# Altium PCB BMS_PCBPcbDoc.PcbDoc
Units mm, origin at the board's own origin, x right, y up, seen from the top; angles counter-clockwise.
Board outline 114.3 x 66.04 mm, 2 copper layers (Top Layer, Bottom Layer), stack 1.534 mm thick; 49 components, 39 nets, 154 pads, 0 vias.
Unrouted connection lines stored in the file: 101.
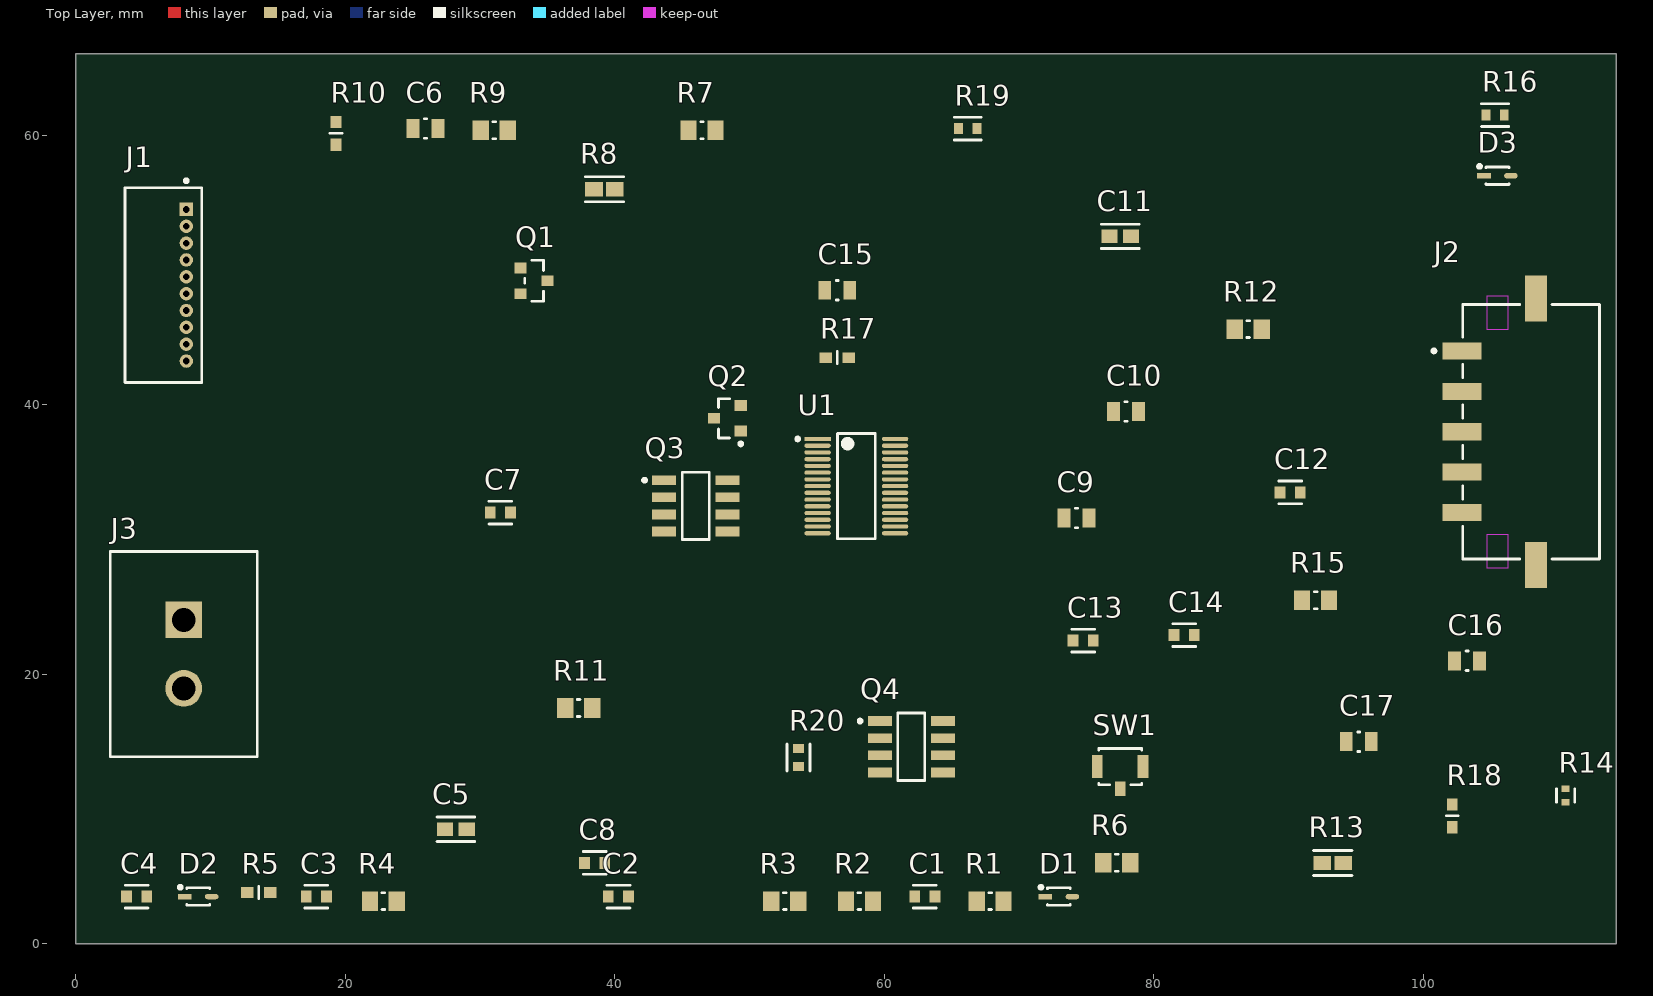
[diagram p0: Top Layer view]
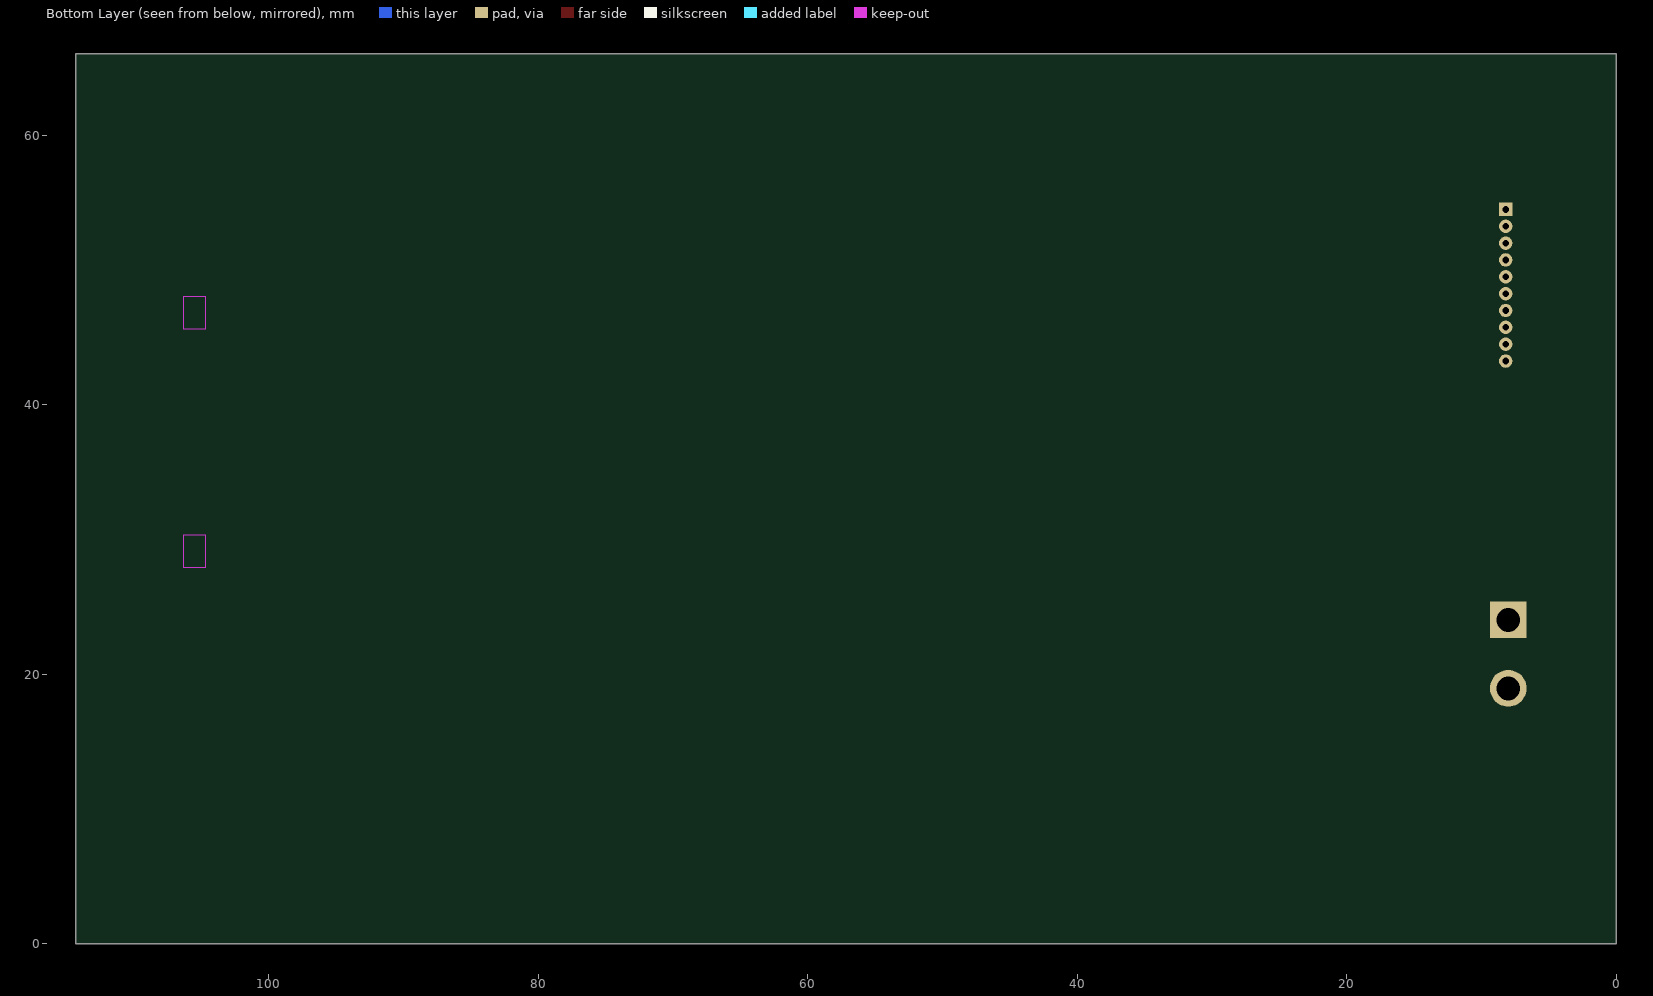
[diagram p1: Bottom Layer view, seen from below]

## Layer stack, top to bottom
Top Solder: solder mask 0.0127, Solder Resist, Dk 3.3
Top Layer: signal copper 0.0178
Dielectric1: core 1.4986, FR-4, Dk 4.3
Bottom Layer: signal copper 0.0178
Bottom Solder: solder mask 0.0127, Solder Resist, Dk 3.3

## Board outline
0,0 114.3,0 114.3,66.04 0,66.04

## Design rules (kind name [scope] priority, off if disabled: settings)
Clearance [All] p1: gap=0.254 ignorepadtopadclearanceinfootprint=FALSE
DiffPairsRouting [All] p1: maxlimit=0.254 minlimit=0.254 mostfreqgap=0.254 toplayer_minwidth=0.254 toplayer_maxwidth=0.254 toplayer_prefwidth=0.254 bottomlayer_minwidth=0.254 bottomlayer_maxwidth=0.254 bottomlayer_prefwidth=0.254 maxuncoupledlength=12.7
HoleSize [All] p1: absolutevalues=TRUE maxlimit=7.62 minlimit=0.254 maxpercent=80.000 minpercent=20.000
MinimumAnnularRing [All] p1: minimumring=0.254
PasteMaskExpansion [All] p1: expansion=0.254
PlaneClearance [All] p1: clearance=0.381
PlaneConnect [All] p1: pad.planeconnectstyle=Relief pad.reliefexpansion=0.508 pad.reliefentries=4 pad.reliefconductorwidth=0.254 pad.reliefairgap=0.254 via.planeconnectstyle=Direct via.reliefexpansion=0.508 via.reliefentries=4 via.reliefconductorwidth=0.254 via.reliefairgap=0.254
PolygonConnect [All] p1: thpad.connectstyle=Relief thpad.reliefconductorwidth=0.254 thpad.reliefentries=4 thpad.polygonreliefangle="90 Angle" thpad.airgapwidth=0.254 smdpad.connectstyle=Relief smdpad.reliefconductorwidth=0.254 smdpad.reliefentries=4 smdpad.polygonreliefangle="90 Angle" smdpad.airgapwidth=0.254 via.connectstyle=Direct via.reliefconductorwidth=0.254 via.reliefentries=4 via.polygonreliefangle="90 Angle" via.airgapwidth=0.254
RoutingVias [All] p1: holewidth=0.254 width=0.508 viastyle="Through Hole" minholewidth=0.254 minwidth=0.508 maxholewidth=0.254 maxwidth=0.508
SMDNeckDown [All] p1: percent=100.000
SilkToSolderMaskClearance SilkscreenOverComponentPads [IsPad] p1: minsilkscreentomaskgap=0.254 clearancetoexposedcopper=TRUE
SolderMaskExpansion [All] p1: expansion=0.254 istentingtop=FALSE
SupplyNets "Schematic Supply Nets_1" [InNet('GND')] p1: voltage=0.000
SupplyNets "Schematic Supply Nets" [InNet(' GND')] p2: voltage=0.000
Width [All] p1: maxlimit=0.254 minlimit=0.254 preferedwidth=0.254
24 further rules are at their usual default settings.

## Components (designator, comment, footprint, x,y, rotation, side; value= is the part's Value field where it differs from the comment)
C1 "CC0603KRX7R7BB105" FP-CC0603-DA-MFG 62.996,3.5 r0 top value="1 uF"
C2 "CC0603KRX7R7BB105" FP-CC0603-DA-MFG 40.263,3.5 r0 top value="1 uF"
C3 "CC0603KRX7R7BB105" FP-CC0603-DA-MFG 17.835,3.5 r0 top value="1 uF"
C4 "CC0603KRX7R7BB105" FP-CC0603-DA-MFG 4.5,3.5 r0 top value="1 uF"
C5 "GRM188R60J106ME47D" FP-GRM188-0_1-e0_2_0_55-IPC_A 28.198,8.5 r0 top
C6 "CC0805KKX7R7BB105" FP-CC0805-0_85-MFG 25.939,60.503 r0 top value="1 uF"
C7 "CC0603KRX7R7BB105" FP-CC0603-DA-MFG 31.5,32 r0 top value="1 uF"
C8 "CC0603KRX7R7BB105" FP-CC0603-DA-MFG 38.5,6 r0 top value="1 uF"
C9 "CC0805KKX7R7BB105" FP-CC0805-0_85-MFG 74.25,31.6 r0 top value="1 uF"
C10 "CC0805KKX7R7BB105" FP-CC0805-0_85-MFG 77.925,39.5 r0 top value="1 uF"
C11 "GRM188R60J106ME47D" FP-GRM188-0_1-e0_2_0_55-IPC_A 77.5,52.5 r0 top
C12 "CC0603KRX5R6BB475" FP-CC0603-DA-MFG 90.119,33.5 r0 top value="4.7 uF"
C13 "CC0603KRX7R7BB105" FP-CC0603-DA-MFG 74.75,22.5 r0 top value="1 uF"
C14 "CC0603KRX7R7BB105" FP-CC0603-DA-MFG 82.25,22.911 r0 top value="1 uF"
C15 "CC0805KRX7R9BB104" FP-CC0805-0_85-MFG 56.5,48.5 r180 top value="100 nF"
C16 "CC0805KRX7R9BB104" FP-CC0805-0_85-MFG 103.245,21 r0 top value="100 nF"
C17 "CC0805KRX7R9BB104" FP-CC0805-0_85-MFG 95.205,15 r0 top value="100 nF"
D1 "1N4148WS" FP-477AB-IPC_C 72.953,3.5 r0 top
D2 "1N4148WS" FP-477AB-IPC_C 9.072,3.5 r0 top
D3 "1N4148WS" FP-477AB-IPC_C 105.5,57 r0 top
J1 "53048-1010" FP-530481010-MFG 6.488,48.875 r90 top
J2 "43650-0514" FP-43650-0514-MFG 108,38 r90 top
J3 "350539-1" FP-350539-1-MFG 8,21.5 r90 top
Q1 "NVTR4503NT1G" On_Semiconductor_318-08_MFG 34,49.2 r0 top
Q2 "NTR1P02LT3G" ONSC-SOT-23-3-318-08_V 48.34,39 r180 top
Q3 "IRF7470TRPBF" FP-PG-DSO-8-MFG 46,32.5 r0 top
Q4 "IRF7470TRPBF" FP-PG-DSO-8-MFG 62,14.623 r0 top
R1 "RC0805FR-071KL" RESC2013X60X35ML10T20 67.848,3.17 r0 top
R2 "RC0805FR-071KL" RESC2013X60X35ML10T20 58.145,3.17 r0 top
R3 "RC0805FR-071KL" RESC2013X60X35ML10T20 52.608,3.17 r0 top
R4 "RC0805FR-071KL" RESC2013X60X35ML10T20 22.813,3.17 r0 top
R5 "RC0603FR-07100RL" FP-RC0603-0_55-MFG 13.568,3.805 r0 top
R6 "RC0805FR-071KL" RESC2013X60X35ML10T20 77.241,6.011 r0 top
R7 "RC0805FR-071KL" RESC2013X60X35ML10T20 46.462,60.376 r0 top
R8 "NCP18XH103F03RB" FP-NCP18-0_15-IPC_A 39.224,56 r0 top
R9 "RC0805FR-071KL" RESC2013X60X35ML10T20 31.044,60.376 r0 top
R10 "RC0603FR-07100RL" FP-RC0603-0_55-MFG 19.309,60.147 r90 top
R11 "RC0805FR-071KL" RESC2013X60X35ML10T20 37.313,17.5 r0 top
R12 "RC0805FR-071KL" RESC2013X60X35ML10T20 87,45.625 r0 top
R13 "NCP18XH103F03RB" FP-NCP18-0_15-IPC_A 93.276,6 r0 top
R14 "AC0402FR-0710KL" FP-AC0402-MFG 110.56,11 r90 top
R15 "RC0805FR-071KL" RESC2013X60X35ML10T20 92,25.5 r0 top
R16 "AC0603FR-071ML" FP-AC0603-IPC_C 105.327,61.5 r180 top
R17 "RC0603FR-07100RL" FP-RC0603-0_55-MFG 56.5,43.5 r0 top
R18 "RC0603FR-07100RL" FP-RC0603-0_55-MFG 102.145,9.5 r90 top
R19 "AC0603FR-071ML" FP-AC0603-IPC_C 66.188,60.5 r0 top
R20 "AC0603FR-071ML" FP-AC0603-IPC_C 53.625,13.823 r90 top
SW1 "B3U-1100P" FP-B3U-1100P-MFG 77.5,13.15 r0 top
U1 "BQ7693000DBT" FP-DBT0030A-IPC_A 57.917,33.968 r0 top

## Footprints (in the part's own frame and the unit in brackets; to place one, negate y for a bottom-side part, rotate by r counter-clockwise, add the part's x,y. Pads: shape width x height; smd on the part's side, far side on the other; paste and mask are expansions set on the pad)
FP-477AB-IPC_C [mm]
  rect 1.006x0.392 smd paste+0 mask+0: 1(-1,0)
  rrect100% 1.006x0.392 smd paste+0 mask+0: 2(1,0)
  silkscreen extent -1.46,-0.65 0.85,0.82, body extent -1.6,-0.72 1.6,0.72, height 0.25
FP-43650-0514-MFG [mm]
  rect 1.27x2.92 smd paste+0 mask+0: 1(6,5.13) 2(3,5.13) 3(0,5.13) 4(-3,5.13) 5(-6,5.13)
  rect 3.43x1.65 smd paste+0 mask+0: 6(-9.885,-0.35) 7(9.885,-0.35)
  Keep-Out Layer region: 7.625,1.7 10.075,1.7 10.075,3.3 7.625,3.3
  Keep-Out Layer region: -10.075,1.7 -7.625,1.7 -7.625,3.3 -10.075,3.3
  silkscreen extent -9.45,-5.07 9.45,7.34, body extent -11.7,-5.18 11.7,6.69, height 0.25
FP-350539-1-MFG [mil]
  rect 107.4x107.4 hole 70 paste-99999 mask+0: 1(100,0)
  round 107.4 hole 70 paste-99999 mask+0: 2(-100,0)
  silkscreen extent -300,-215 300,215, body extent -304,-219 304,219, height 10
FP-530481010-MFG [mm]
  rect 1x1 hole 0.5 paste-2539.97 mask+0: 1(5.625,-1.7)
  round 1 hole 0.5 paste-2539.97 mask+0: 2(4.375,-1.7) 3(3.125,-1.7) 4(1.875,-1.7) 5(0.625,-1.7) 6(-0.625,-1.7) 7(-1.875,-1.7) 8(-3.125,-1.7) 9(-4.375,-1.7) 10(-5.625,-1.7)
  silkscreen extent -7.22,-2.85 7.87,2.85, body extent -7.32,-2.95 7.32,2.95, height 0.25
FP-AC0402-MFG [mm]
  rect 0.5x0.6 smd paste+0 mask+0: 1(-0.5,0) 2(0.5,0)
  silkscreen extent -0.5,-0.67 0.5,0.67, body extent -0.85,-0.4 0.85,0.4, height 0.25
FP-AC0603-IPC_C [mm]
  rect 0.659x0.812 smd paste+0 mask+0: 1(-0.677,0) 2(0.677,0)
  silkscreen extent -1.01,-0.85 1.01,0.85, body extent -1.11,-0.55 1.11,0.55, height 0.25
FP-B3U-1100P-MFG [mm]
  rect 0.8x1.7 smd paste+0 mask+0: 1(1.7,0) 2(-1.7,0)
  rect 0.8x1.1 smd paste+0 mask+0: 3(0,-1.65)
  silkscreen extent -1.6,-1.35 1.6,1.35, body extent -2.2,-2.3 2.2,1.45, height 0.25
FP-CC0603-DA-MFG [mm]
  rect 0.8x0.9 smd paste+0 mask+0: 1(-0.75,0) 2(0.75,0)
  silkscreen extent -0.85,-0.85 0.85,0.85, body extent -1.35,-0.75 1.35,0.75, height 0.25
FP-CC0805-0_85-MFG [mm]
  rect 0.95x1.4 smd paste+0 mask+0: 1(-0.925,0) 2(0.925,0)
  silkscreen extent -0.08,-0.72 0.08,0.72, body extent -1.6,-1.05 1.6,1.05, height 0.25
FP-DBT0030A-IPC_A [mm]
  rect 1.955x0.312 smd paste+0 mask+0: 1(-2.875,3.5)
  rrect100% 1.955x0.312 smd paste+0 mask+0: 2(-2.875,3) 3(-2.875,2.5) 4(-2.875,2) 5(-2.875,1.5) 6(-2.875,1) 7(-2.875,0.5) 8(-2.875,0) 9(-2.875,-0.5) 10(-2.875,-1) 11(-2.875,-1.5) 12(-2.875,-2) 13(-2.875,-2.5) 14(-2.875,-3) 15(-2.875,-3.5) 16(2.875,-3.5) 17(2.875,-3) 18(2.875,-2.5) 19(2.875,-2) 20(2.875,-1.5) 21(2.875,-1) 22(2.875,-0.5) 23(2.875,0) 24(2.875,0.5) 25(2.875,1) 26(2.875,1.5) 27(2.875,2) 28(2.875,2.5) 29(2.875,3) 30(2.875,3.5)
  silkscreen extent -4.48,-3.9 1.4,3.9, body extent -4.35,-4.4 4.35,4.4, height 0.25
FP-GRM188-0_1-e0_2_0_55-IPC_A [mm]
  rect 1.208x1.012 smd paste+0 mask+0: 1(-0.802,0) 2(0.802,0)
  silkscreen extent -1.41,-0.91 1.41,0.91, body extent -1.91,-1.01 1.91,1.01, height 0.25
FP-NCP18-0_15-IPC_A [mm]
  rect 1.306x1.058 smd paste+0 mask+0: 1(-0.776,0) 2(0.776,0)
  silkscreen extent -1.43,-0.93 1.43,0.93, body extent -1.93,-1.03 1.93,1.03, height 0.25
FP-PG-DSO-8-MFG [mm]
  rect 1.78x0.72 smd paste+0 mask+0: 1(-2.34,1.905) 2(-2.34,0.635) 3(-2.34,-0.635) 4(-2.34,-1.905) 5(2.34,-1.905) 6(2.34,-0.635) 7(2.34,0.635) 8(2.34,1.905)
  silkscreen extent -3.92,-2.5 1,2.5, body extent -3.33,-2.68 3.33,2.68, height 0.25
FP-RC0603-0_55-MFG [mm]
  rect 0.9x0.8 smd paste+0 mask+0: 1(-0.85,0) 2(0.85,0)
  silkscreen extent 0,-0.45 0,0.45, body extent -1.4,-0.55 1.4,0.55, height 0.25
On_Semiconductor_318-08_MFG [mm]
  rect 0.9x0.8 smd paste+0 mask+0: 1(-1,0.95) 2(-1,-0.95) 3(1,0)
  silkscreen extent -0.7,-1.52 0.7,1.52, body extent -1.55,-1.62 1.55,1.62, height 0.25
ONSC-SOT-23-3-318-08_V [mm] "SOT23, 3-Leads, Body 2.92x1.3mm, Pitch 0.95mm"
  rect 0.9x0.8 smd: 1(-1,0.95) 2(-1,-0.95) 3(1,0)
  silkscreen extent -1.13,-1.46 0.65,2.02, body extent -0.65,-1.46 0.65,1.46, height 1.11
RESC2013X60X35ML10T20 [mm] "Chip Resistor, 2-Leads, Body 2.1x1.35mm, IPC Low Density"
  rect 1.2x1.45 smd: 1(-1,0) 2(1,0)
  silkscreen extent -0.1,-0.63 0.1,0.63, body extent -1.05,-0.68 1.05,0.67, height 0.6

## Part data
C1 C2 C3 C4 C7 C8 C13 C14: library part CMP-03422-000924-1, "CAP CER 1UF 16V X7R 0603", Capacitance="1 uF", Manufacturer=YAGEO, Package=CC0603-DA, Temperature="-55°C to +125°C", Temperature Characteristic=X7R, Temperature Coefficient=15%, Temperature Range High=+125°C, Temperature Range Low=-55°C, Tolerance=0.1, Voltage="16 V", Automotive=No, Category=Cap, ComponentLink2Description=Datasheet, ComponentLink2URL=http://www.yageo.com/documents/recent/UPY-GPHC_X7R_6.3V-to-50V_18.pdf, Device Class L1="Passive Components", Device Class L2=Capacitors, Device Class L3="Ceramic Capacitors", Digikey Description="CAP CER 1UF 16V X7R 0603", Footprint Url=http://www.yageo.com/exep/pages/download/literatures/UPY-C_GEN_24.pdf, Height=0.9mm, Lead Free=Yes, Manufacturer Part Number=CC0603KRX7R7BB105, Material=Ceramic, Mouser Description="Multilayer Ceramic Capacitor, CC Series, 1 - F, - 10%, X7R, 16 V, 0603 [1608 Metric]", Octopart=https://octopart.com/cc0603krx7r7bb105-yageo-42271928, RoHS=TRUE, Voltage Rating="16 V"
C5 C11: library part CMP-2006-02792-2, "Chip Multilayer Ceramic Capacitors for General Purpose, 0603, 10uF, X5R, 15%, 20%, 6.3V", Capacitance=10uF, Case Code (Imperial)=0603, Case Code (Metric)=1608, Dielectric=X5R, Max Operating Temperature=85°C, Min Operating Temperature=-55°C, Package Quantity=4000, Tolerance=20%, Voltage=6.3V, Case/Package=0603, Depth=0.8mm, Height=0.8mm, Lead Free="Lead Free", Length=1.6mm, Material=Ceramic, Mount="Surface Mount", Packaging="Tape and Reel", Radiation Hardening=No, REACH SVHC="No SVHC", Termination=SMD/SMT, Thickness=0.035inch, Voltage Rating=6.3V, Voltage Rating (DC)=6.3V, Width=0.031inch
C6 C9 C10: library part CMP-03422-000001-1, "CAP CER 1UF 16V X7R 0805", Capacitance="1 uF", Manufacturer=Yageo, Package=CC0805-0.85, Temperature="-30°C to +85°C", Temperature Characteristic=X7R, Temperature Range High=+85°C, Temperature Range Low=-30°C, Tolerance=0.1, Voltage Rating="16 V", Automotive=No, Category=Cap, ComponentLink2Description=Datasheet, ComponentLink2URL=http://www.yageo.com/documents/recent/UPY-GPHC_Y5V_6.3V-to-50V_8.pdf, Device Class L1="Passive Components", Device Class L2=Capacitors, Device Class L3="Ceramic Capacitors", Digikey Description="CAP CER 1UF 16V X7R 0805", Footprint Url=http://www.yageo.com/exep/pages/download/literatures/UPY-C_GEN_24.pdf, Height=0.95mm, Ipc Land Pattern Name=CAPC200125X85, Lead Free=Yes, Manufacturer Part Number=CC0805KKX7R7BB105, Material=Ceramic, Mouser Description="Multilayer Ceramic Capacitors MLCC - SMD/SMT 1.0uF 16V X7R 10%", Octopart=https://octopart.com/cc0805kkx7r7bb105-yageo-8376555, RoHS=TRUE
C12: library part CMP-2000-06074-2, "CAP CER 4.7UF 10V X5R 0603", Capacitance="4.7 uF", Manufacturer=YAGEO, Package=CC0603-DA, Temperature="-55°C to +125°C", Temperature Characteristic=X5R, Temperature Coefficient=15%, Temperature Range High=+125°C, Temperature Range Low=-55°C, Tolerance=0.1, Voltage="10 V", Automotive=No, Category=Cap, ComponentLink2Description=Datasheet, ComponentLink2URL=http://www.yageo.com/documents/recent/UPY-GPHC_X7R_6.3V-to-50V_18.pdf, Device Class L1="Passive Components", Device Class L2=Capacitors, Device Class L3="Ceramic Capacitors", Digikey Description="CAP CER 4.7UF 10V X5R 0603", Footprint Url=http://www.yageo.com/exep/pages/download/literatures/UPY-C_GEN_24.pdf, Height=0.9mm, Lead Free=Yes, Manufacturer Part Number=CC0603KRX5R6BB475, Material=Ceramic, Mouser Description="4.7µF Surface Mount, MLCC 0603 (1608 Metric) Package Ceramic Capacitors", Octopart=https://octopart.com/cc0603krx5r6bb475-yageo-9292507, RoHS=TRUE, Voltage Rating="10 V"
C15 C16 C17: library part CMP-2100-03606-3, "CAP CER 0.1UF 50V X7R 0805", Capacitance="100 nF", Manufacturer=Yageo, Package=CC0805-0.85, Temperature="-30°C to +85°C", Temperature Characteristic=X7R, Temperature Range High=+85°C, Temperature Range Low=-30°C, Tolerance=0.1, Voltage Rating="50 V", Automotive=No, Category=Cap, ComponentLink2Description=Datasheet, ComponentLink2URL=http://www.yageo.com/documents/recent/UPY-GPHC_Y5V_6.3V-to-50V_8.pdf, Device Class L1="Passive Components", Device Class L2=Capacitors, Device Class L3="Ceramic Capacitors", Digikey Description="CAP CER 0.1UF 50V X7R 0805", Footprint Url=http://www.yageo.com/exep/pages/download/literatures/UPY-C_GEN_24.pdf, Height=0.95mm, Ipc Land Pattern Name=CAPC200125X85, Lead Free=Yes, Manufacturer Part Number=CC0805KRX7R9BB104, Material=Ceramic, Mouser Description="Multilayer Ceramic Capacitors MLCC - SMD/SMT 100nF 50V X7R 10%", Octopart=https://octopart.com/cc0805krx7r9bb104-yageo-192993, RoHS=TRUE
D1 D2 D3: library part CMP-07163-000040-1, "DIODE GEN PURP 75V 150MA SOD323F", Average Rectified Current=150mA, Forward Voltage=1V, Max Forward Surge Current (Ifsm)=2A, Max Operating Temperature=150°C, Max Repetitive Reverse Voltage (Vrrm)=75V, Min Operating Temperature=-55°C, Package Quantity=1, Peak Reverse Current=5uA, Power Dissipation=200mW, Contact Plating=Tin, Element Configuration=Single, Forward Current=150mA, Height=1mm, Lead Free="Lead Free", Length=1.8mm, Max Reverse Voltage (DC)=75V, Mount="Surface Mount", Number of Pins=2, Packaging="Tape and Reel", Radiation Hardening=No, REACH SVHC="No SVHC", Recovery Time=4ns, Reverse Recovery Time=4ns, Reverse Voltage=75V, Weight=0.0276g, Width=1.35mm
J1: library part CMP-04776-000812-2, "CONN HEADER R/A 10POS 1.25MM", Color=Natural, Contact Resistance=20mΩ, Current Rating=1A, Flammability Rating="UL94 V-0", Insulation Resistance=100MΩ, Manufacturer Lifecycle Status=ACTIVE, Max Operating Temperature=85°C, Max Voltage Rating (AC)=125V, Min Operating Temperature=-40°C, Body Plating=Tin, Contact Material=Tin, Contact Plating=Tin, Country of Origin=US, Depth=5.5mm, Gender=Male, Glow Wire Compliant=Non-compliant, Height=3.7mm, Housing Color=Natural, Housing Material=Nylon, Lead Free="Lead Free", Lead Pitch=1.25mm, Length=14.25mm, Lifecycle Status=Production, Max Current Rating=1A, Mount="Through Hole", NexarPartId=276823, Number of Circuits=10, Number of Contacts=10, Number of Pins=10, Number of Poles=10, Number of Positions=10, Number of Rows=1, Orientation="Right Angle", Pitch=1.25mm, Plating=Tin, Radiation Hardening=No, REACH SVHC=Unknown, RoHS=Compliant, Schedule B="8536694040, 8536694040", Termination=Solder, Voltage Rating=125V, Voltage Rating (AC)=125V, Voltage Rating (DC)=125V, Working Voltage=125V
J2: library part CMP-00257-07658320-1, "43650-0514 Conn Power HDR 5 POS 3mm Solder RA SMD 5 Terminal 1 Port Micro-Fit 3.0™ Embossed T/R", Current Rating=5A, Manufacturer Lifecycle Status=ACTIVE, Voltage Rating=600V, Contact Material=Brass, Contact Plating=Gold, Country of Origin=US, Gender=Male, Glow Wire Compliant=Compliant, Halogen Free="Low Halogen", Housing Material=Thermoplastic, Lifecycle Status=Production, NexarPartId=7658320, Number of Circuits=5, Number of Contacts=5, Number of Positions=5, Number of Rows=1, Orientation="Right Angle", Pitch=3mm, Plating=Tin, RoHS=Compliant, Termination=Solder
J3: library part CMP-03369-000078-1, "CONN HEADER VERT 2POS 5.08MM", Current Rating=12A, Manufacturer="TE Connectivity", Temperature="-55°C to +105°C", Temperature Range High=+105°C, Temperature Range Low=-55°C, Voltage Rating=250V, Automotive=No, Category=Conn, ComponentLink2Description=Datasheet, ComponentLink2URL=https://www.te.com/usa-en/product-350539-1.html?te_bu=Cor&te_type=other&te_campaign=oct_glo_cor-oct-global-oth-prtnr-fy19-oct-octo-buy-bom_sma-298_2&elqCampaignId=35216, Conn Gender=Male, Conn Orientation=Vertical, Contact Material=Gold,Nickel, Device Class L1=Connectors, Device Class L2="Headers and Wire Housings", Device Class L3=unset, Digikey Description="CONN HEADER VERT 2POS 5.08MM", Height=0.41inch, Lead Free=Yes, Manufacturer Part Number=350539-1, Mouser Description="Pin & Socket Connectors CONN PCM 2 POS TIN", Number of Contacts=2, Number of Rows=1, Octopart=https://octopart.com/350539-1-te+connectivity-46510628, Package=350539-1, Pitch=5.08mm, RoHS=TRUE, Standoff Height=0.025inch
Q1: library part CMP-1058-00743-2, Case/Package=SOT-23, Continuous Drain Current (ID)=1.5A, Drain to Source Breakdown Voltage=36V, Drain to Source Resistance=85mΩ, Drain to Source Voltage (Vdss)=30V, Gate to Source Voltage (Vgs)=20V, Input Capacitance=135pF, Manufacturer Lifecycle Status=ACTIVE, Max Junction Temperature (Tj)=150°C, Max Power Dissipation=420mW, Min Operating Temperature=-55°C, Element Configuration=Single, Height=1.01mm, Lead Free="Lead Free", Length=3.04mm, Lifecycle Status=Production, Max Operating Temperature=150°C, NexarPartId=18688338, Number of Channels=1, Number of Elements=1, Number of Pins=3, Packaging=Digi-Reel®, Power Dissipation=420mW, Radiation Hardening=No, Rds On Max=110mΩ, RoHS=Compliant, Schedule B="8541210080, 8541210080", Turn-Off Delay Time=14ns, Turn-On Delay Time=5.8ns, Width=1.4mm
Q2: library part CMP-1058-00747-1, "Power MOSFET, -20 V, -1.3 A, P-Channel, 3-Pin SOT-23, Pb-Free, Tape and Reel", Manufacturer="On Semiconductor", Package Type=SOT-23-3, Channel Polarity="P Channel", Ciss Typ (pF)=225, ComponentLink1Description="Manufacturer URL", ComponentLink1URL=http://www.onsemi.com/, ComponentLink2Description=Datasheet, ComponentLink2URL=http://www.onsemi.cn/pub_link/Collateral/NTR1P02LT1-D.PDF, ComponentLink3Description="Package Specification", ComponentLink3URL=http://www.onsemi.cn/pub_link/Collateral/318-08.PDF, Configuration=Single, Coss Typ (pF)=130, Crss Typ (pF)=55, DatasheetVersion="Rev. 13", ID Max (A)=1.3, Mounting Technology="Surface Mount", PackageDescription="3-Pin Small Outline Transistor, Body 2.92 x 1.3 mm, Pitch 0.95 mm", PackageReference=SOT-23-3-318-08, PackageVersion="Rev. AP, 11/2009", Packing="Tape and Reel", PartNumber=NTR1P02LT3G, PD Max (W)=0.4, Qrr Typ (nC)=8.5, RoHS=Pb-Free, V(BR)DSS Min (V)=20, VGS Max (V)=12, VGS(th) Max (V)=1.25
Q3 Q4: library part CMP-32901-000117-1, "MOSFET N-CH 40V 10A 8-SOIC", Continuous Drain Current=10A, Drain to Source Breakdown Voltage=40V, Drain to Source Resistance=10mΩ, Gate To Source Voltage=12V, Input Capacitace At Vds="3430pF @ 20V", Manufacturer=Infineon, Max Forward Diode Voltage=1.3V, Max Junction Temp=+150°C, Package=PG-DSO-8, Power Dissipation=2.5W, Pulse Drain Current=85A, Temperature="-55°C to +150°C", Temperature Range Low=-55°C, Typ Forward Diode Voltage=0.8V, Automotive=No, Category=Trans, ComponentLink2Description=Datasheet, ComponentLink2URL=https://www.infineon.com/dgdl/irf7470pbf.pdf?fileId=5546d462533600a4015355ff2fe11c18, Depletion Mode=False, Device Class L1="Discrete Semiconductors", Device Class L2=Transistors, Device Class L3=MOSFETs, Digikey Description="MOSFET N-CH 40V 10A 8-SOIC", Drain To Source Voltage=40V, Footprint Url=https://www.infineon.com/dgdl/po-so8.pdf?fileId=5546d462580663ef0158068a1275014d, Gate Charge At Vgs="29nC @ 4.5V", Height=1.75mm, Lead Free=Yes, Manufacturer Part Number=IRF7470TRPBF, Number of Channels=1, Number Of N Channels=1, Octopart=https://octopart.com/irf7470trpbf-infineon-65873616, Reverse Recovery Charge=130nC, Reverse Recovery Time=72ns, RoHS=TRUE, Rthja Max=50°C/W, Standoff Height=0.1mm, Temperature Range High=+150°C, Threshold Vgs Max=2V, Threshold Vgs Min=0.8V, Turn Off Delay Time=21ns, Turn On Delay Time=10ns
R1 R2 R3 R4 R6 R7 R9 R11 R12 R15: library part CMP-2100-03671-1, "Chip Resistor, 1 KOhm, +/- 1%, 125 mW, -55 to 155 degC, 0805 (2012 Metric), RoHS, Tape and Reel", Case Code (Imperial)=0805, Case Code (Metric)=2012, Manufacturer=Yageo, Max Operating Temperature=155degC, Max Power Dissipation=125mW, Min Operating Temperature=-55degC, Package Description="2-Pin Surface Mounted Device, Body 2 x 1.25 mm", Package Quantity=1, Resistance=1KOhm, Temperature Coefficient=100ppm/degreesC, Tolerance=1%, Voltage Rating=150V, Case/Package=0805, Composition=ThickFilm, Datasheet URL=http://www.yageo.com/NewPortal/yageodocoutput?fileName=/pdf/R-Chip/PYu-RC_Group_51_RoHS_L_5.pdf, Datasheet Version="Rev. 5, 10/2016", Depth=1.25mm, Height=0.024inch, Lead Free=LeadFree, Length=0.079inch, Manufacturer URL=http://www.yageo.com/, Military Standard=Not, Number of Pins=2, Number of Terminations=2, Package Reference=0805, Packaging=TapeandReel, Power Rating=125mW, REACH SVHC=Unknown, RoHSCompliant=true, Termination=SMD/SMT, Voltage Rating (DC)=150V, Width=0.049inch
R5 R10 R17 R18: library part CMP-2100-03663-2, Case Code (Imperial)=0603, Max Operating Temperature=155°C, Min Operating Temperature=-55°C, Power Rating=100mW, Resistance=100Ω, Temperature Coefficient=100ppm/°C, Tolerance=1%, Voltage Rating=50V, Case Code (Metric)=0603, Case/Package=0603, Composition="Thick Film", Depth=800µm, Height=450µm, Lead Free="Lead Free", Length=1.6mm, Military Standard=Not, NexarPartId=55402879, Number of Pins=2, Packaging="Tape & Reel", REACH SVHC=Unknown, RoHS=Compliant, Schedule B="8533210045, 8533210045", Termination=SMD/SMT, Voltage Rating (DC)=50V, Width=800µm
R8 R13: library part CMP-2000-05271-3, "NTC Thermistor for Temperature Sensor, 0603, 10kΩ, 1%, 0.1mA, 5V", Case Code (Imperial)=0603, Case Code (Metric)=1608, Current Rating=310uA, Manufacturer Series=NCP18, Max Operating Temperature=125°C, Max Power Dissipation=100mW, Min Operating Temperature=-40°C, Package Quantity=1, Package Shape=Rectangular, Resistance=10kR, Resistance Tolerance=1%, Accuracy=0.7%, Case/Package=0603, Depth=0.8mm, Height=0.8mm, Lead Free="Lead Free", Length=1.6mm, Mount="Surface Mount", Number of Pins=2, Number of Terminals/Pins=2, Packaging="Tape and Reel", Power Rating=100mW, Radiation Hardening=No, REACH SVHC="No SVHC", RoHS Compliant=Yes, Series=NCP, Terminal Finish=Tin, Terminal Placement=Dual, Termination=SMD/SMT, Thermistor Application="TEMPERATURE COMPENSATION", Tolerance=1%
R14: library part CMP-2002-01790-3, "RES 10kΩ ±1% 0.063W 0402", Case Code (Imperial)=0402, Case Code (Metric)=1005, Max Operating Temperature=155°C, Max Power Dissipation=63mW, Min Operating Temperature=-55°C, Power Rating=62.5mW, Resistance=10kR, Resistor Type="Thick Film", Temperature Coefficient=100ppm/°C, Tolerance=1%, Voltage Rating=50V, Case/Package=0402, Construction=Rectangular, Depth=0.5mm, Features="Moisture Resistant", Height=0.015inch, Lead Free="Lead Free", Length=0.039inch, Military Standard=Not, Number of Terminations=2, Packaging="Tape and Reel", RoHS Compliant=Yes, Series=AC, Size Code=0402, Termination=SMD/SMT, Width=0.02inch
R16 R19 R20: library part CMP-2000-04829-2, "RES 1MΩ 1.00% 0.1W 0603", Case Code (Imperial)=0603, Case Code (Metric)=1608, Max Operating Temperature=155°C, Max Power Dissipation=100mW, Min Operating Temperature=-55°C, Package Quantity=1, Ratings=AEC-Q200, Resistance=1MR, Resistor Type="Thick Film", Temperature Coefficient=100ppm/°C, Tolerance=1%, Voltage Rating=50V, Case/Package=0603, Features="Moisture Resistant", Height=0.022inch, Lead Free="Lead Free", Length=0.063inch, Number of Terminations=2, Packaging="Tape and Reel", Power Rating=100mW, RoHS Compliant=Yes, Series=AC, Termination=SMD/SMT, Width=0.031inch
SW1: library part CMP-2000-05903-2, "SWITCH TACTILE SPST-NO 0.05A 12V", Contact Current Rating=50mA, Contact Resistance=100mR, Max Operating Temperature=70°C, Max Voltage Rating (DC)=12V, Min Operating Temperature=-25°C, Operating Force=1.5N, Package Quantity=1, Ratings="Dust Proof", Actuator Length=0.4mm, Actuator Type=Standard, Contact Plating=Silver, Current Rating=50mA, Depth=4mm, Electrical Life=200000Cycles, Illumination Type=Non-Illuminated, Lead Free="Lead Free", Length=3.15mm, Max Current Rating=50mA, Mechanical Life=200000Cycles, Mount="Surface Mount", Orientation=Straight, Packaging="Tape and Reel", Switch Function=Off-Mom, Switch Travel=0.15mm, Termination=SMD/SMT, Throw Configuration=SPST, Voltage Rating (DC)=12V, Weight=0.022g
U1: library part CMP-04911-000035-1, "IC BATT MGMT LI-ION AFE 30TSSOP", Case/Package=TSSOP, Max Operating Temperature=85°C, Min Operating Temperature=-40°C, Operating Supply Voltage=25V, Output Voltage=3.6V, Package Quantity=60, Contact Plating=Gold, Fault Protection="Over Current", Interface=I2C, Lead Free="Lead Free", Mount="Surface Mount", Number of Pins=30, Packaging=Rail/Tube, RoHS Compliant=Yes, Weight=0.003439oz

## Nets (pads, with @x,y where several pads share a name; then routed paths per layer and width w, separated by ;. In a path a pad name is that pad's centre, name@x,y a point inside that pad or via, vN(x,y) a via of type N, cw(c..) or ccw(c..) an arc to the next point about the centre after c; other vN are vias at no path point)
" GND": C13.2 C14.1
GND: C9.1 C10.1 C11.2 C12.2 C15.2 C17.1 J1.10 Q2.1 R13.1 R15.1 R17.1 U1.3
NetC1_1: C1.1 D1.2 R1.2 U1.16
NetC1_2: C1.2 C2.1 R2.2 R3.2 U1.17 U1.18 U1.19
NetC2_2: C2.2 C3.1 R4.2 U1.20
NetC3_2: C3.2 C4.1
NetC4_2: C4.2 R6.2 U1.21
NetC5_1: C5.1 D1.1 J1.1 J3.1 Q1.3 R1.1 R5.1 R5.2 U1.15
NetC5_2: C5.2 C6.1 C11.1 D2.1 Q1.1 R8.1 R10.2 U1.10
NetC6_2: C6.2 U1.11 U1.12 U1.14
NetC7_1: C7.1 C7.2 C8.1 R9.2 R11.2 U1.23 U1.24 U1.25
NetC8_2: C8.2 C13.1 R12.2 SW1.2 U1.26
NetC9_2: C9.2 U1.7
NetC10_2: C10.2 Q1.2 U1.9
NetC12_1: C12.1 J2.1 U1.8
NetC14_2: C14.2 R15.2 U1.27
NetC15_1: C15.1 C16.2 R17.2 U1.28
NetC16_1: C16.1 C17.2 R18.2 U1.29
NetD2_2: D2.2 R7.2 U1.22
NetD3_1: D3.1 Q4.4 R16.2 R20.1
NetD3_2: D3.2 Q2.3 R16.1
NetJ1_2: J1.2 R2.1
NetJ1_3: J1.3 R3.1
NetJ1_4: J1.4 R4.1
NetJ1_5: J1.5 J1.6 R6.1 R7.1 R10.1
NetJ1_7: J1.7 R9.1
NetJ1_8: J1.8 R11.1
NetJ1_9: J1.9 R12.1
NetJ2_2: J2.2 U1.30
NetJ2_3: J2.3 U1.5
NetJ2_4: J2.4 U1.4
NetJ3_2: J3.2 Q4.1 R20.2
NetQ2_2: Q2.2 U1.2
NetQ3_1: Q3.1 R18.1 R19.2
NetQ3_4: Q3.4 R19.1 U1.1
NetQ3_5: Q3.5 Q4.5
NetR8_2: R8.2 U1.13
NetR13_2: R13.2 R14.2 U1.6
NetR14_1: R14.1 SW1.1
pads on no net: J2.5 J2.6 J2.7 Q3.2 Q3.3 Q3.6 Q3.7 Q3.8 Q4.2 Q4.3 Q4.6 Q4.7 Q4.8 SW1.3